# Altium PCB нижняя плата версия 3.PcbDoc (part 1 of 2)
Units mm, origin at the board's own origin, x right, y up, seen from the top; angles counter-clockwise.
Board outline 57.07 x 52.6 mm, 4 copper layers (Top Layer, Layer 1, Layer 2, Bottom Layer), stack 0.603 mm thick; 110 components, 105 nets, 540 pads, 81 vias.
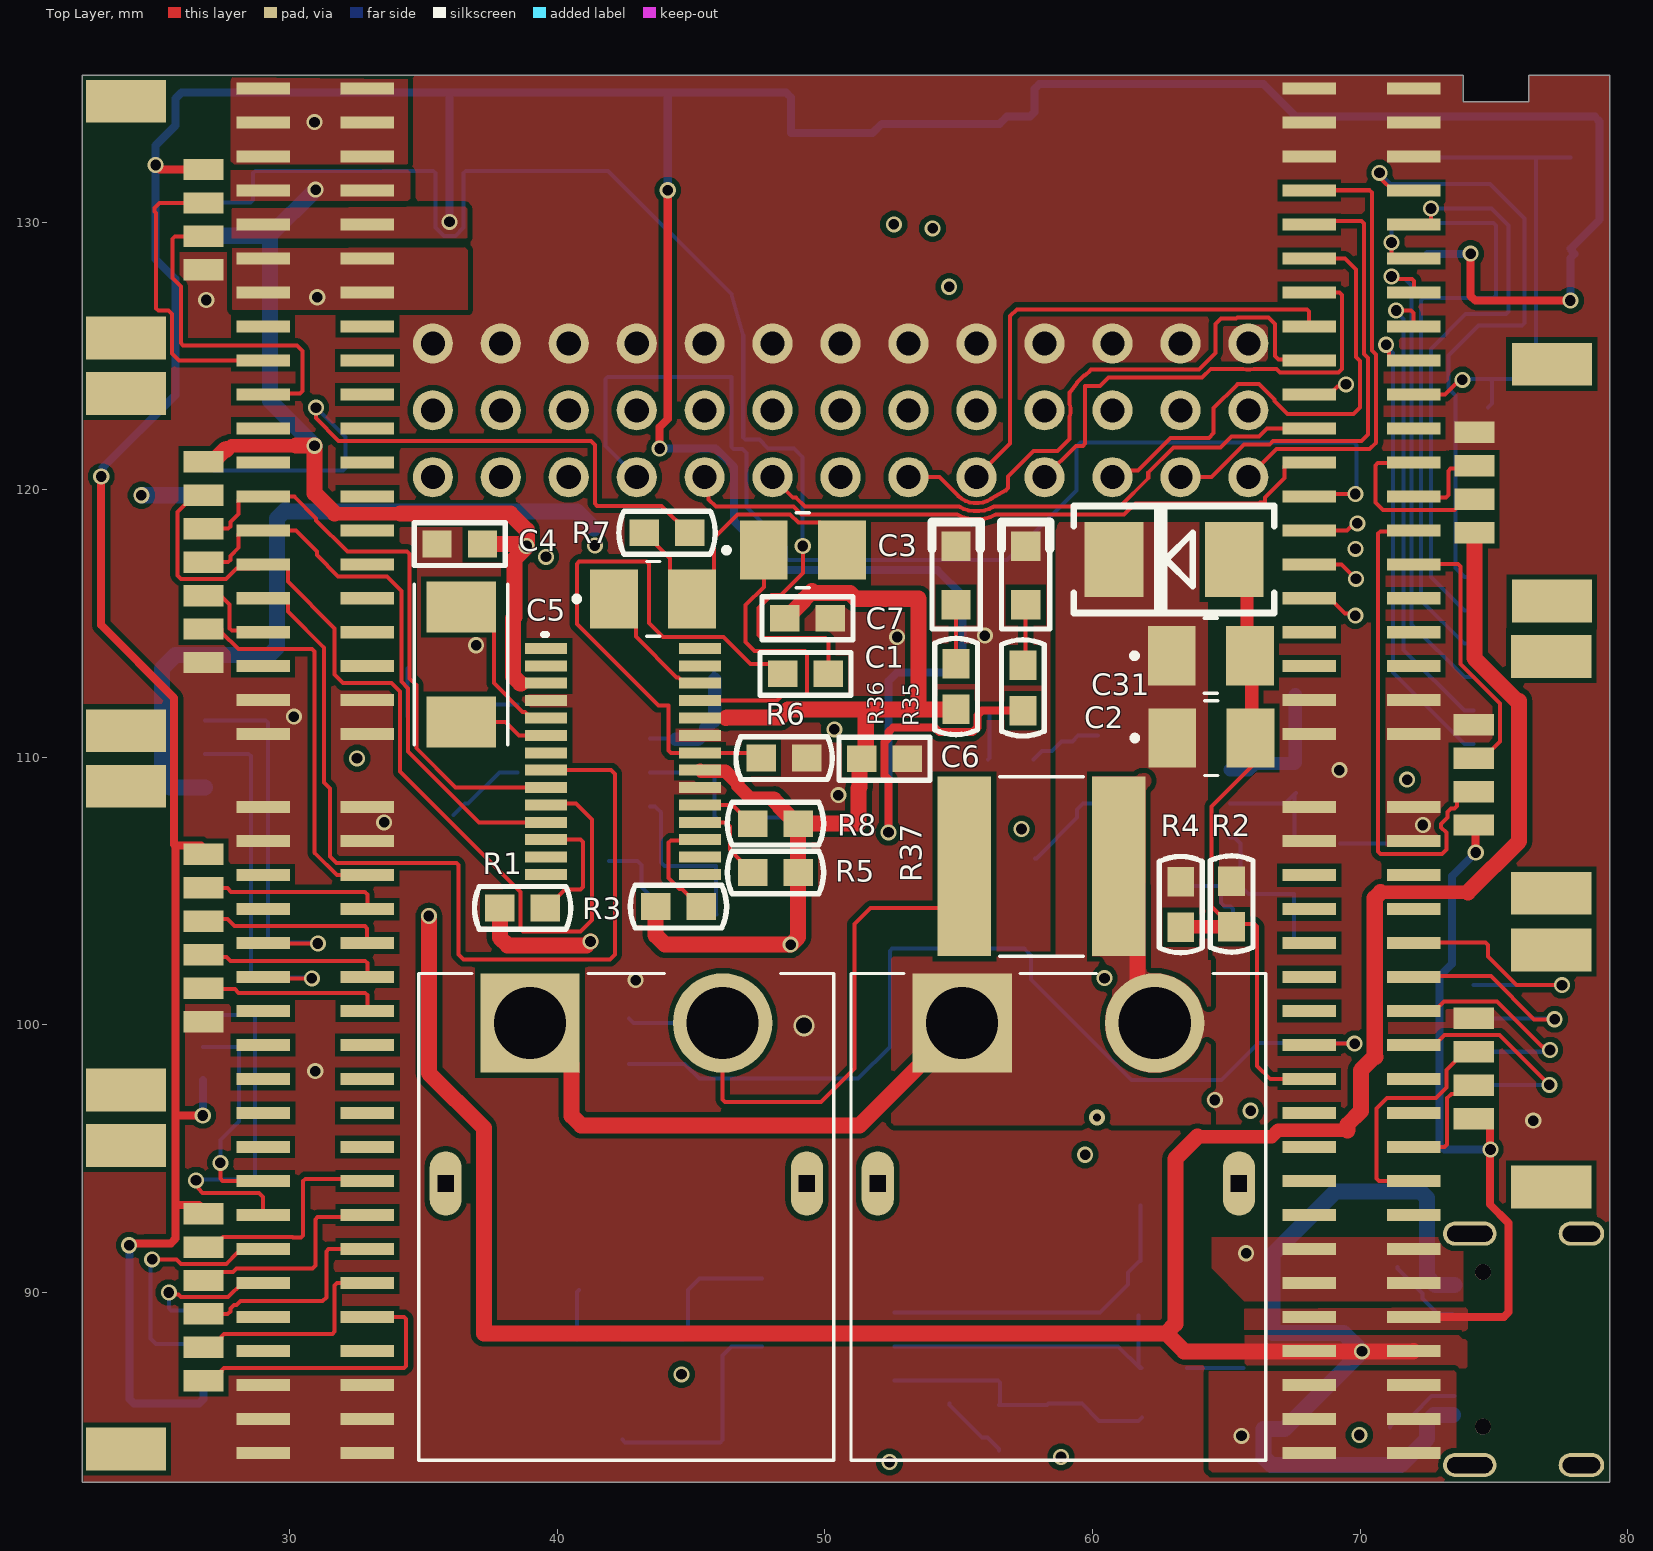
[diagram p0: Top Layer view]
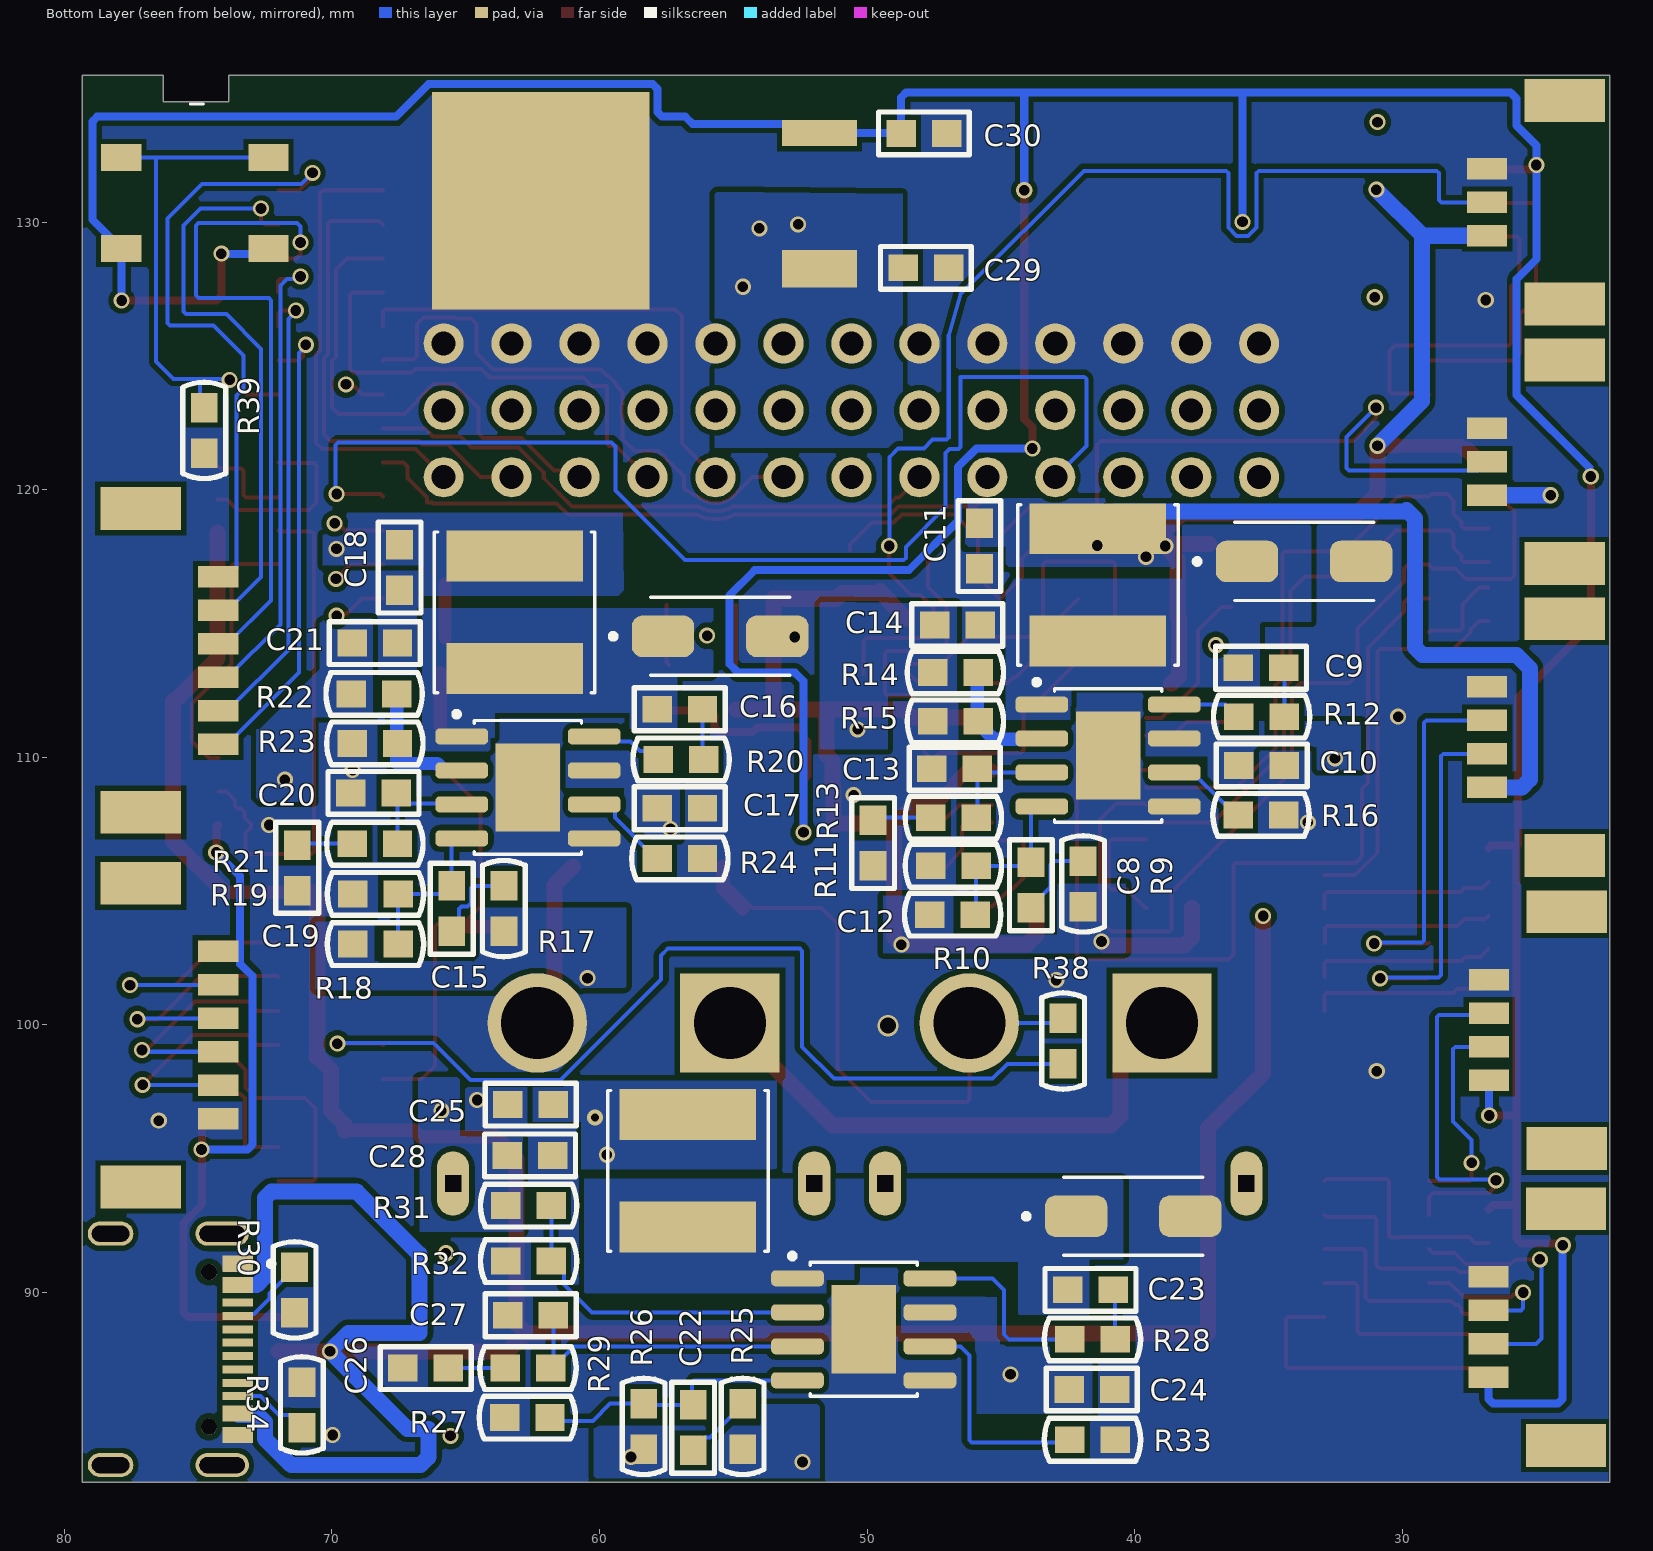
[diagram p1: Bottom Layer view, seen from below]
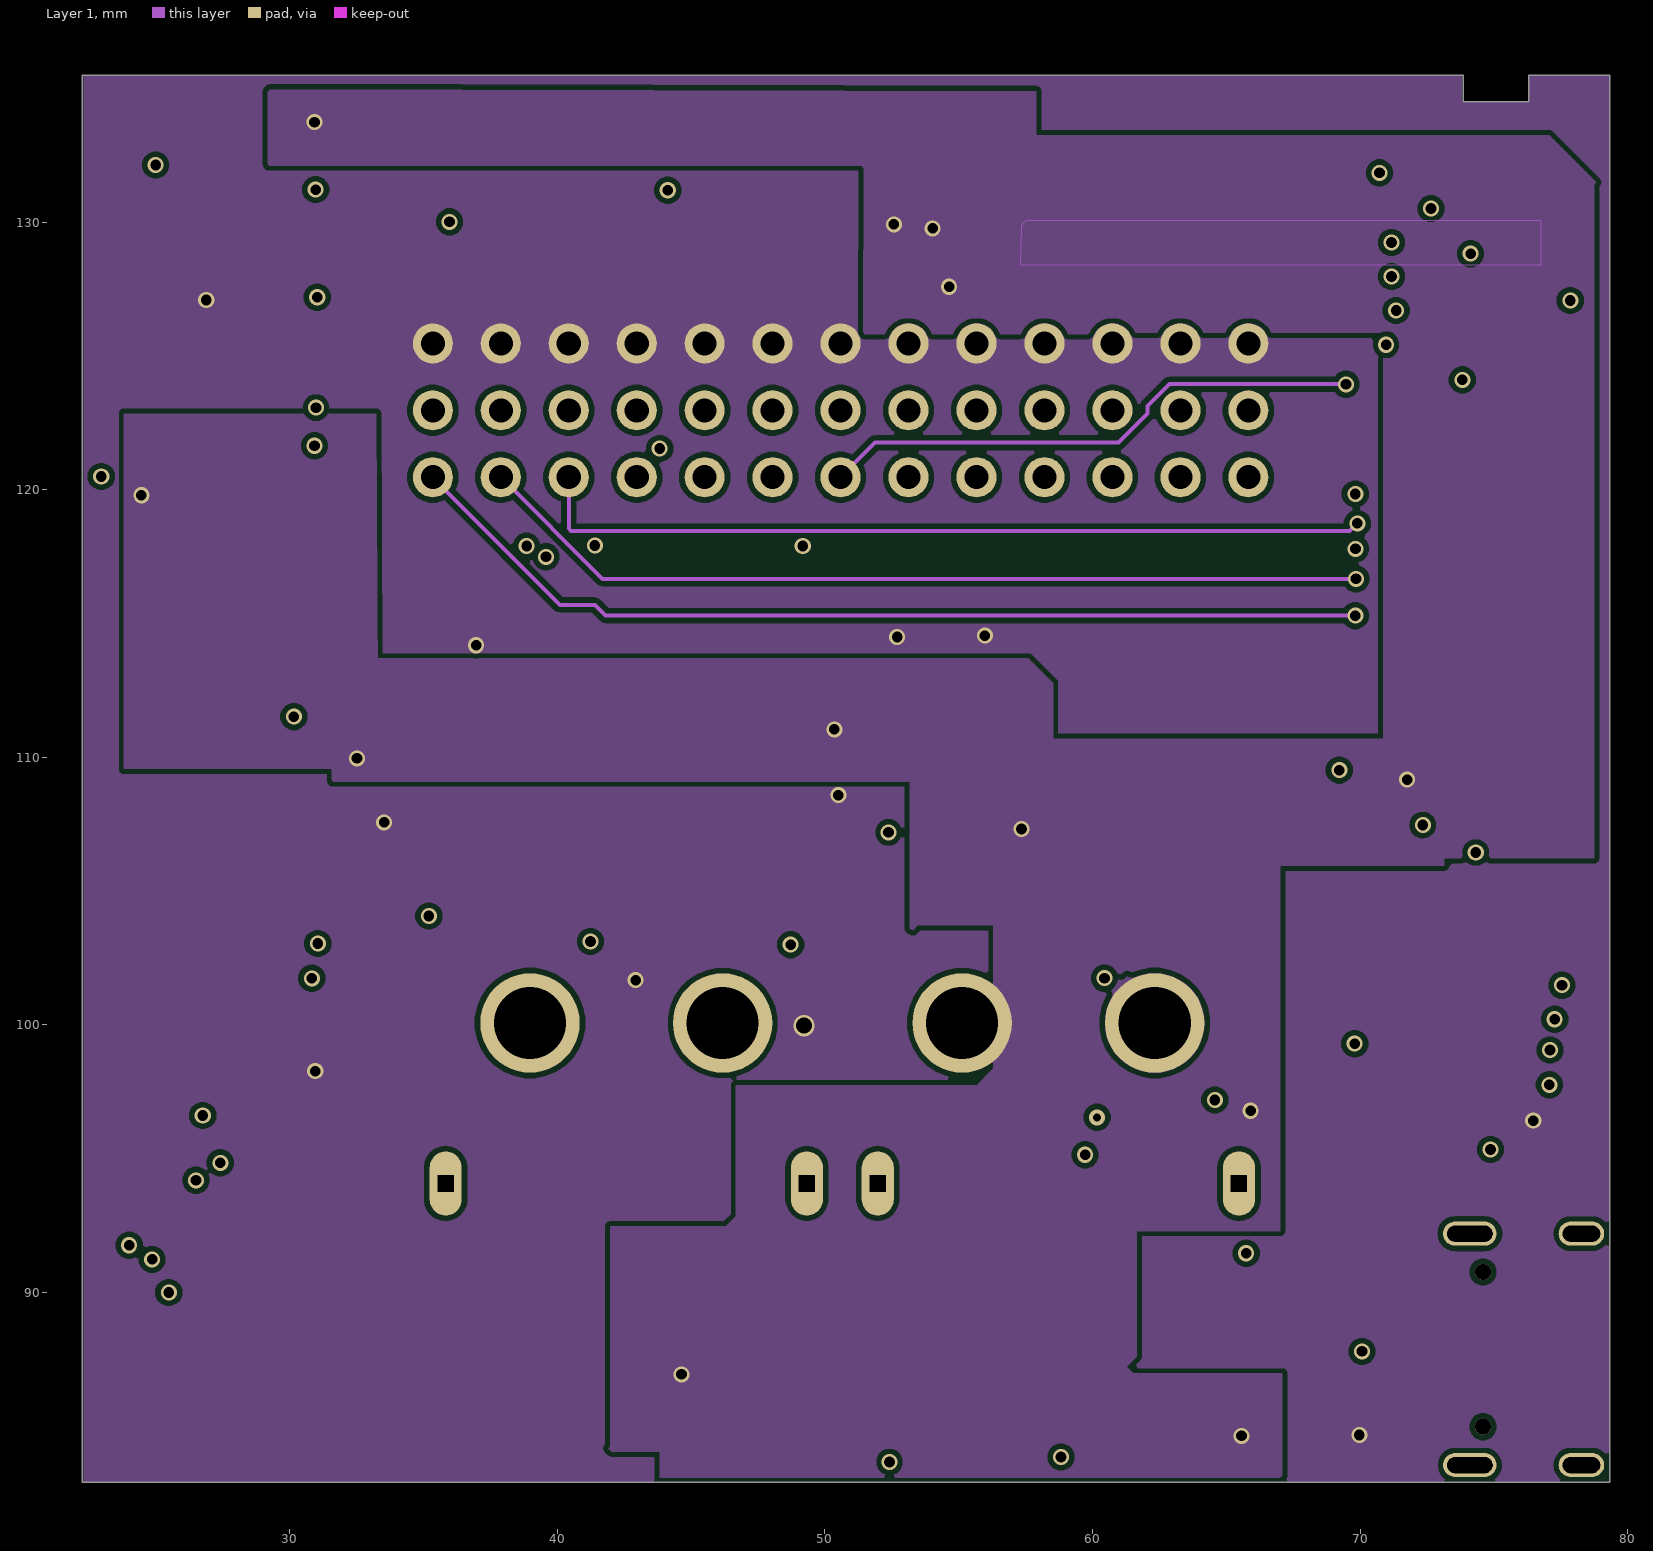
[diagram p2: Layer 1]
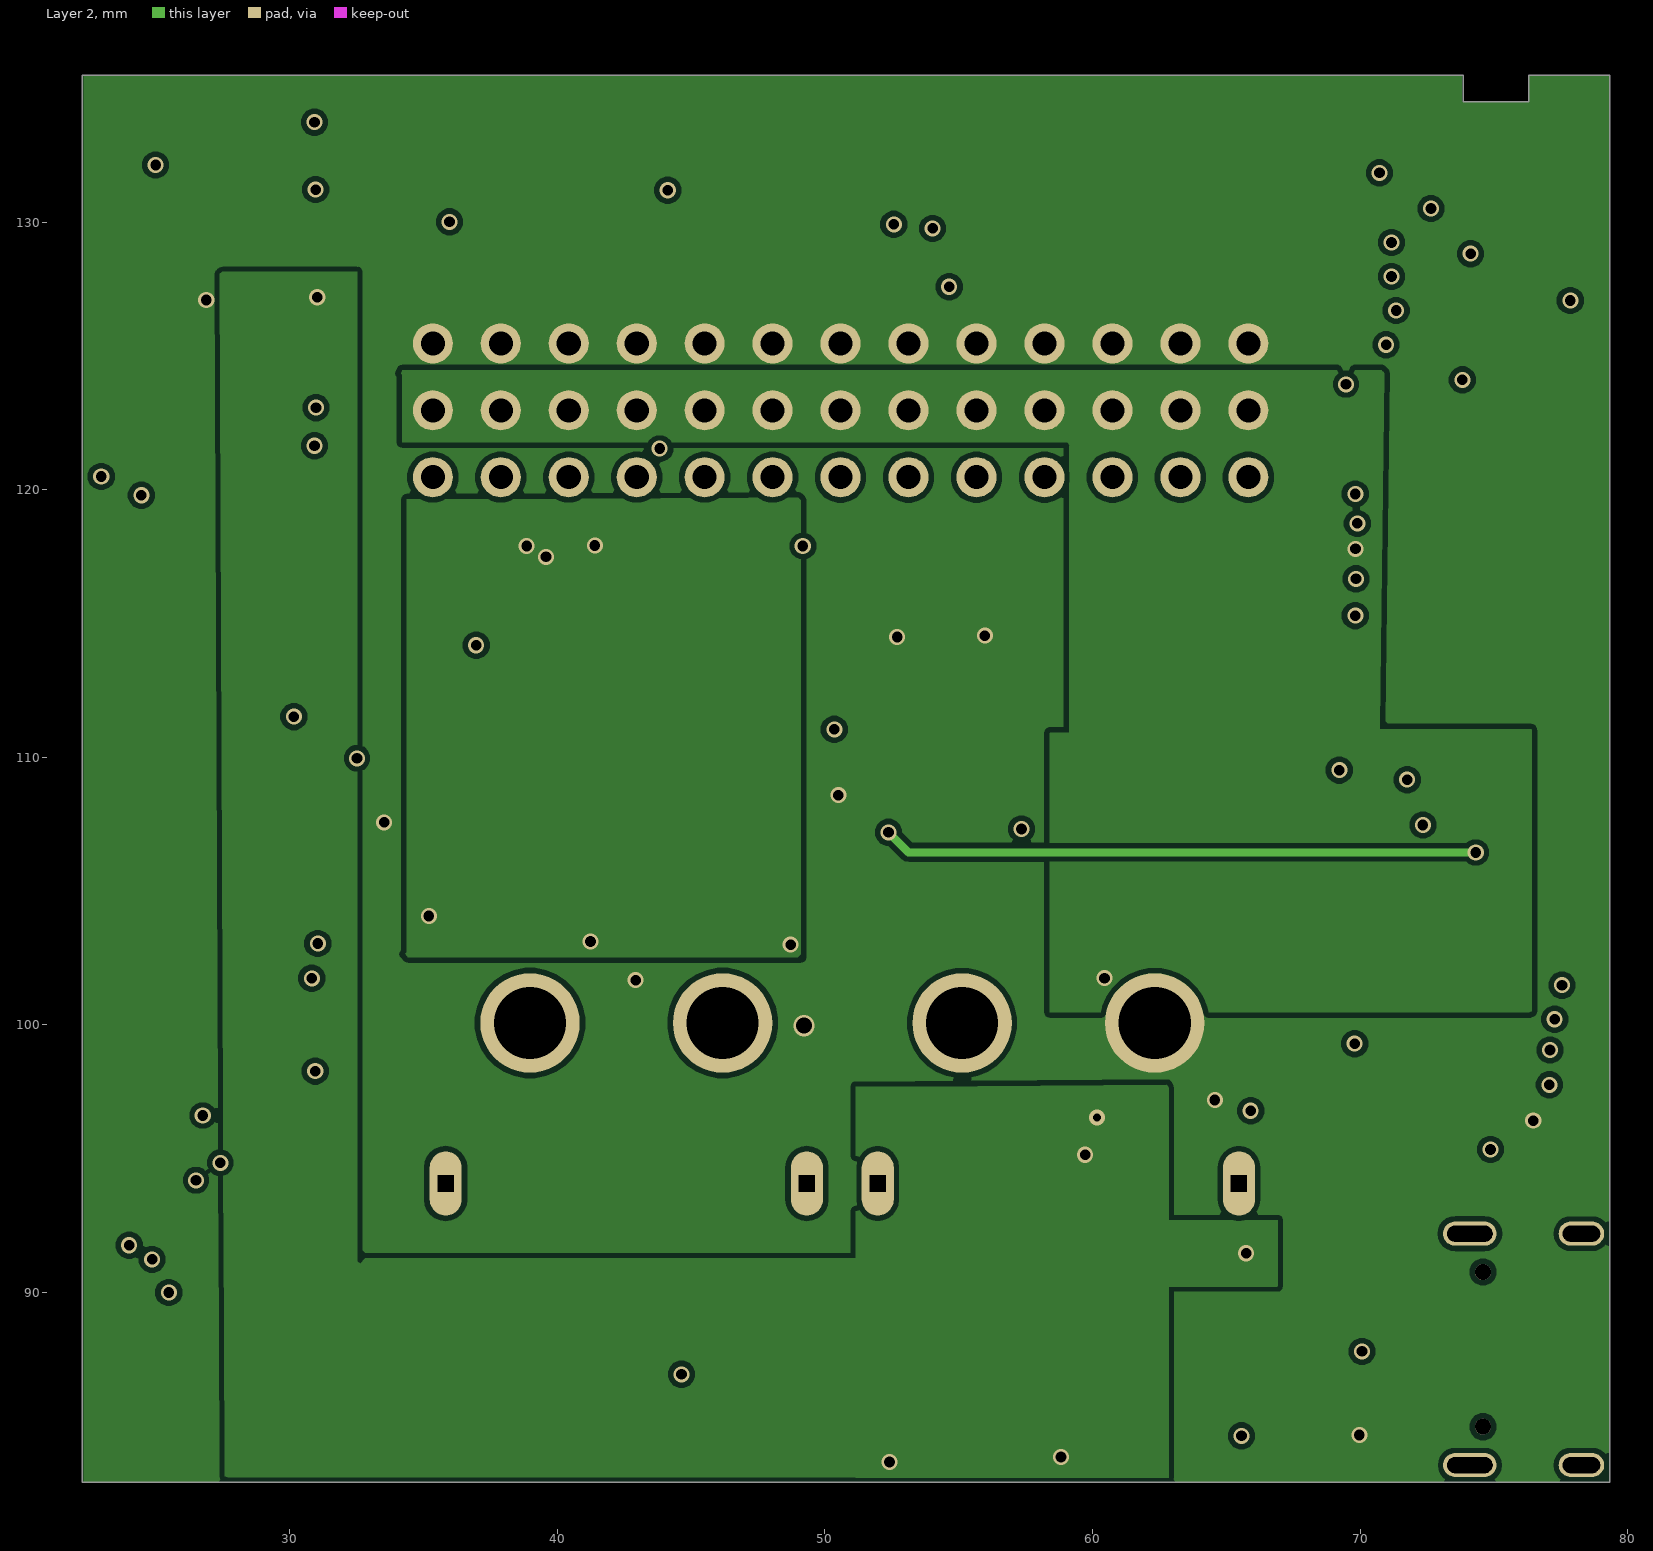
[diagram p3: Layer 2]
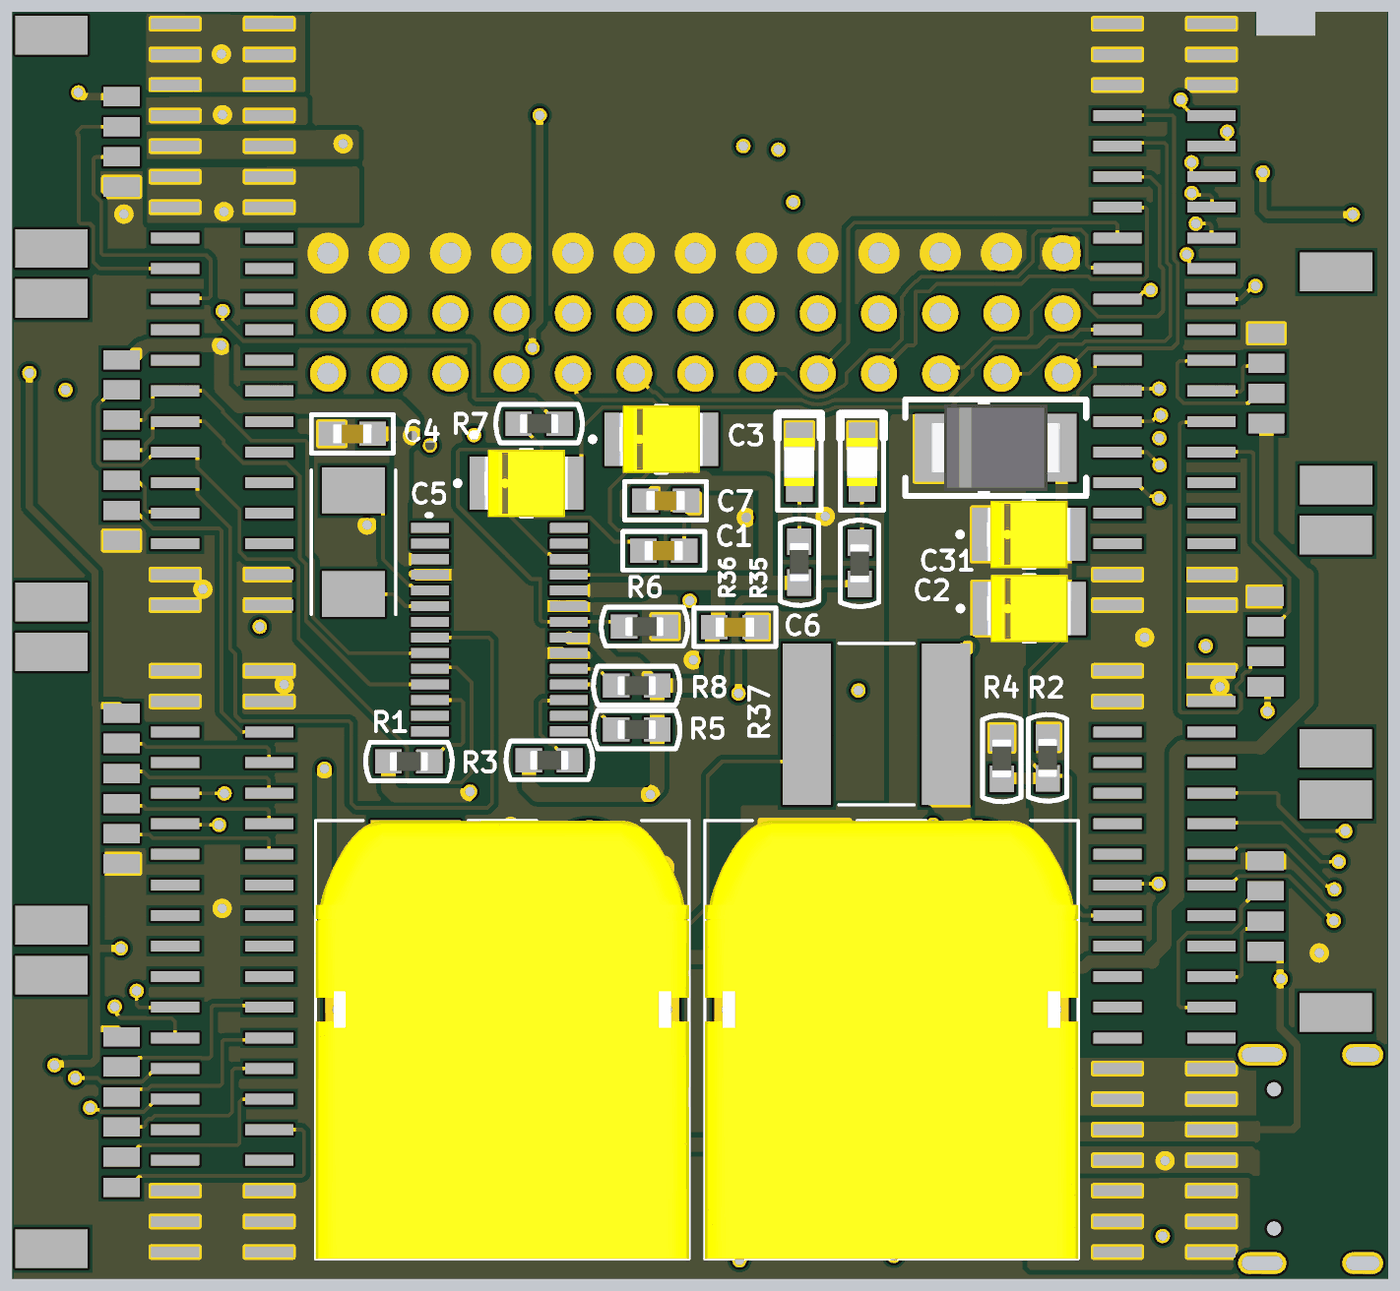
[diagram p5: 3D render of the assembled board from above, using the file's embedded part models]
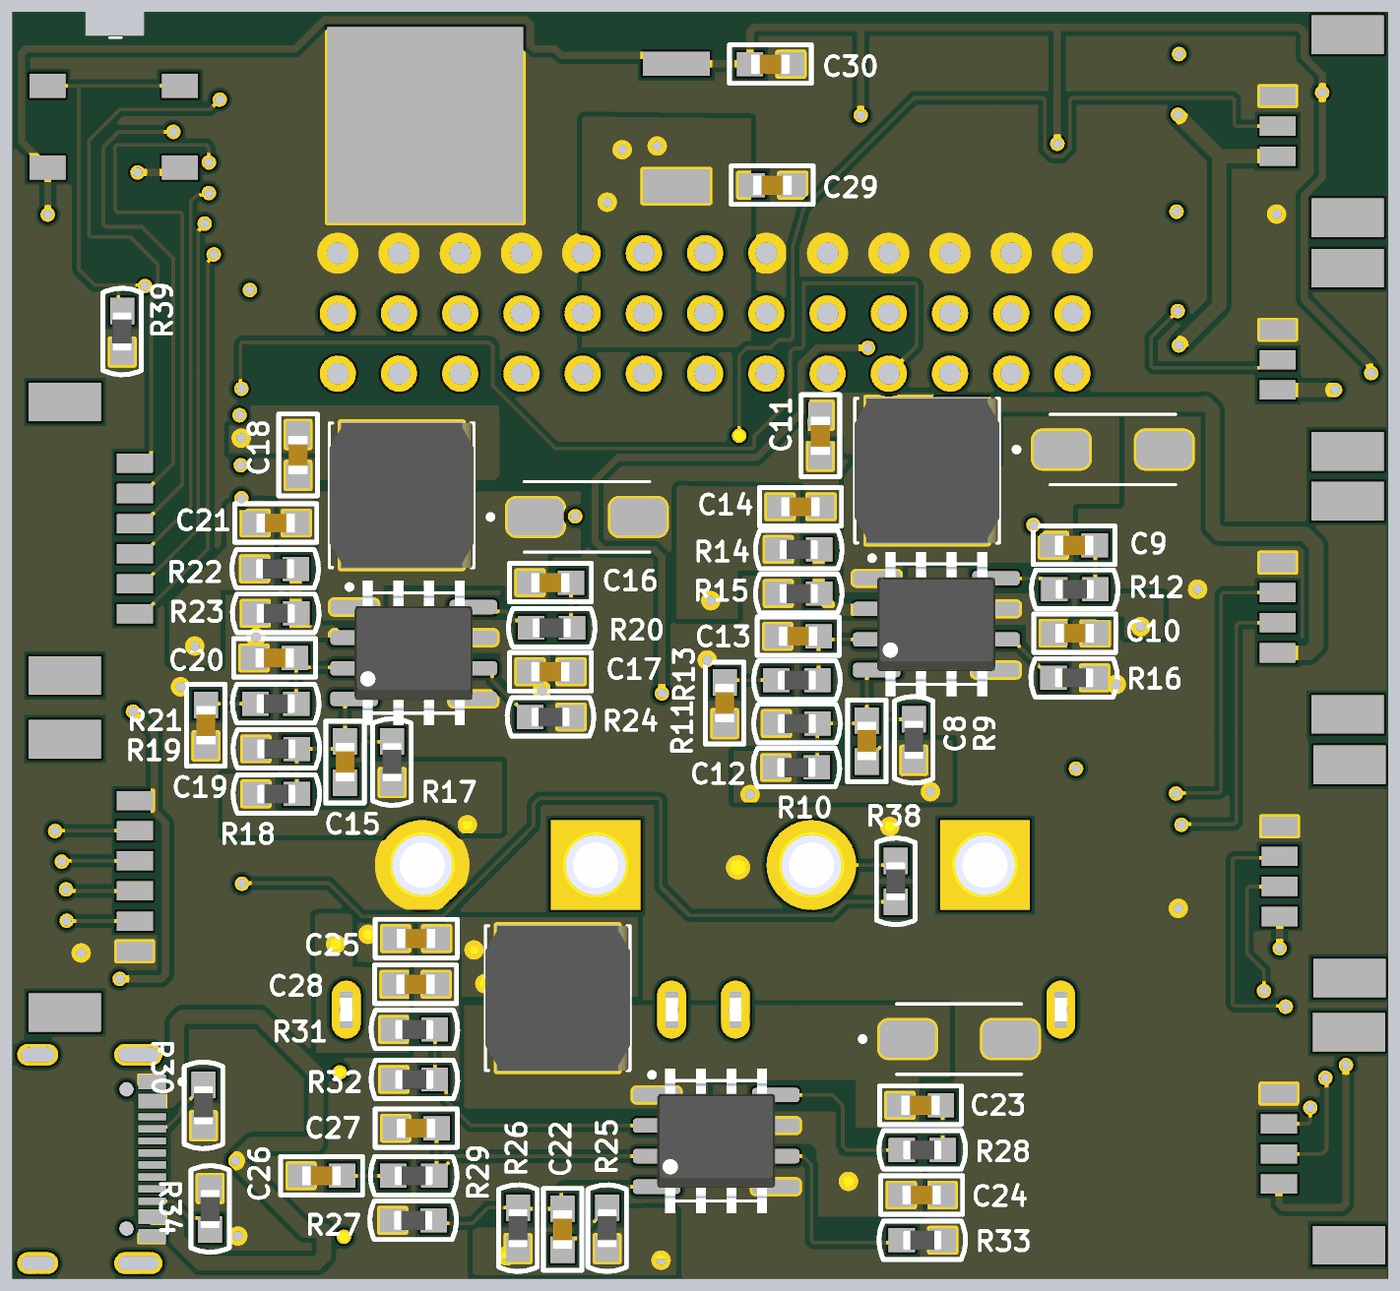
[diagram p6: 3D render of the assembled board from below, using the file's embedded part models]

## Layer stack, top to bottom
Top Solder: solder mask 0.0102, Solder Resist, Dk 3.5
Top Layer: signal copper 0.0356
Dielectric 2: prepreg 0.0711, PP-006, Dk 4.1
Layer 1: signal copper 0.035
Dielectric 1: dielectric 0.32, FR-4, Dk 4.8
Layer 2: signal copper 0.035
Dielectric 3: prepreg 0.0711, PP-006, Dk 4.1
Bottom Layer: signal copper 0.0356
Bottom Solder: solder mask 0.0102, Solder Resist, Dk 3.5

## Board outline
76.3,135.5 76.3,134.5 73.85,134.5 73.85,135.5 22.25,135.5 22.25,82.9 79.325,82.9 79.325,135.5

## Design rules (kind name [scope] priority, off if disabled: settings)
Clearance [All] p1: gap=0.2 ignorepadtopadclearanceinfootprint=FALSE except(0: Arc-Hole Track-Hole SMDPad-Hole THPad-Hole Via-Hole Fill-Hole Poly-Hole Region-Hole Text-Hole; 0.125: Arc-Text Track-Text SMDPad-Text THPad-Text Via-Text Fill-Text Poly-Text Region-Text Text-Text; 0.15: Arc-Arc Arc-Track Arc-SMDPad Arc-THPad Arc-Via Track-Track Track-SMDPad Track-THPad Track-Via SMDPad-SMDPad SMDPad-THPad SMDPad-Via THPad-THPad THPad-Via Via-Via)
PolygonConnect [All] p1: connectstyle=Direct reliefconductorwidth=0.254 reliefentries=4 polygonreliefangle="90 Angle" airgapwidth=0.254
RoutingVias [All] p1: holewidth=0.4 width=0.6 viastyle="Through Hole" minholewidth=0.4 minwidth=0.6 maxholewidth=0.4 maxwidth=0.6
SolderMaskExpansion [All] p1: expansion=0.102 istentingtop=FALSE
Width Width_6 [InNet('SERVO')] p1: maxlimit=0.6 minlimit=0.6 preferedwidth=0.6 minimp=50.000000 maximp=50.000000 favimp=50.000000
Width Width_5 [InNet('VCC')] p2: maxlimit=0.6 minlimit=0.6 preferedwidth=0.6 minimp=50.000000 maximp=50.000000 favimp=50.000000
Width Width_4 [InNet('GND')] p3: maxlimit=0.7 minlimit=0.6 preferedwidth=0.6 minimp=50.000000 maximp=50.000000 favimp=50.000000
Width Width_3 [InNet('5V')] p4: maxlimit=0.6 minlimit=0.5 preferedwidth=0.6 minimp=50.000000 maximp=50.000000 favimp=50.000000
Width Width_2 [InNet('4V2')] p5: maxlimit=0.4 minlimit=0.4 preferedwidth=0.4 minimp=50.000000 maximp=50.000000 favimp=50.000000
Width Width_1 [InNet('3V3')] p6: maxlimit=0.3 minlimit=0.3 preferedwidth=0.3 minimp=50.000000 maximp=50.000000 favimp=50.000000
Width [All] p7: maxlimit=0.6 minlimit=0.15 preferedwidth=0.15 minimp=50.000000 maximp=50.000000 favimp=50.000000
30 further rules are at their usual default settings.

## Classes and differential pairs
component class "нижняя плата версия 2": 3 C1 C2 C3 C4 C5 C6 C7 C8 C9 C10 C11 C12 C13 C14 C15 C16 C17 C18 C19 C20 C21 C22 C23 C24 C25 C26 C27 C28 C29 C30 C31 R1 R2 R3 R4 R5 R6 R7 R8 R9 R10 R11 R12 R13 R14 R15 R16 R17 R18 R19 R20 R21 R22 R23 R24 R25 R26 R27 R28 R29 R30 R31 R32 R33 R34 R35 R36 R37 R38 R39

## Components (designator, comment, footprint, x,y, rotation, side; value= is the part's Value field where it differs from the comment)
ADC "Header 1x6" "PicoBlade 6pin" 25.125,89.885 r270 top
AT "AT7456" at7456 42.377,109.301 r0 top
C1 "Capacitor" C0603 49.275,113.125 r0 top
C2 "T493B105K025BC6120" CAPPM3528X210N 64.44,110.725 r0 top
C3 "T493B105K025BC6120" CAPPM3528X210N 49.175,117.75 r0 top
C4 "Capacitor" C0603 36.35,117.975 r180 top
C5 "T493B105K025BC6120" CAPPM3528X210N 43.575,115.925 r0 top
C6 "Capacitor" C0603 52.225,109.95 r0 top
C7 "Capacitor" C0603 49.35,115.2 r0 top
C8 "22 pF" C0603 43.875,105.225 r90 bottom
C9 "0.1 uF" C0603 35.275,113.35 r0 bottom
C10 "0.1 uF" C0603 35.25,109.7 r0 bottom
C11 "22 uF" C0603 45.8,117.9 r270 bottom
C12 "330 pF" C0603 49.775,106.8 r270 bottom
C13 "1 pF" C0603 46.725,109.575 r0 bottom
C14 "4.7 uF" C0603 46.625,114.95 r0 bottom
C15 "22 pF" C0603 65.525,104.35 r90 bottom
C16 "0.1 uF" C0603 57,111.8 r0 bottom
C17 "0.1 uF" C0603 57,108.1 r0 bottom
C18 "22 uF" C0603 67.475,117.1 r270 bottom
C19 "330 pF" C0603 71.3,105.875 r270 bottom
C20 "1 pF" C0603 68.45,108.675 r0 bottom
C21 "4.7 uF" C0603 68.4,114.275 r0 bottom
C22 "22 pF" C0603 56.5,84.95 r90 bottom
C23 "0.1 uF" C0603 41.65,90.1 r0 bottom
C24 "0.1 uF" C0603 41.6,86.375 r0 bottom
C25 "33 uF" C0603 62.575,97.025 r0 bottom
C26 "330 pF" C0603 66.5,87.175 r0 bottom
C27 "2 pF" C0603 62.575,89.15 r0 bottom
C28 "4.7 uF" C0603 62.6,95.125 r0 bottom
C29 "0.1 uF" C0603 47.8,128.3 r0 bottom
C30 "10 uF" C0603 47.875,133.325 r0 bottom
C31 "T493B105K025BC6120" CAPPM3528X210N 64.425,113.8 r0 top
CAN1 "Header 1x4" "PicoBlade 4pin" 75.8,120.24 r90 top
D1 "B340A-13-F" DIOM5226X240N 33.665,117.325 r180 bottom
D2 "B340A-13-F" DIOM5226X240N 55.49,114.525 r180 bottom
D3 "B340A-13-F" DIOM5226X240N 40.05,92.85 r180 bottom
DC1 "MP1584EN" SOIC127P600X170-9N 40.993,110.075 r180 bottom
DC2 "MP1584EN" SOIC127P600X170-9N 62.675,108.88 r180 bottom
DC3 "MP1584EN" SOIC127P600X170-9N 50.125,88.625 r180 bottom
ENET "Header 1x6" "PicoBlade 6pin" 75.9,113.685 r270 bottom
GND "SERVO" SERV 50.458,125.475 r0 top
GPIO "Header 1x6" "PicoBlade 6pin" 25.125,103.31 r270 top
I2C "I2C 1x4" "PicoBlade 4pin" 25.3,110.725 r90 bottom
IN "IN 1x3" "PicoBlade 3pin" 24.175,130.79 r90 bottom
L1 "12.3 uH" IND_VLS6045EX-150M 41.375,116.45 r90 bottom
L2 "12.3 uH" IND_VLS6045EX-150M 63.175,115.425 r90 bottom
L3 "12.3 uH" IND_VLS6045EX-150M 56.7,94.55 r90 bottom
LDO "КФ1158Н" ТО-263 52.802,128.133 r90 bottom
LED1 "Text" LD0805 54.9,116.8 r90 top
LED2 "Text" LD0805 57.5,116.8 r90 top
OUT "OUT 1x3" "PicoBlade 3pin" 24.175,121.09 r90 bottom
R1 "1 kOm" R0603 38.7,104.375 r180 top
R2 "" R0603 65.2,104.525 r90 top
R3 "1 kOm" R0603 44.525,104.425 r180 top
R4 "" R0603 63.3,104.5 r90 top
R5 "1 kOm" R0603 48.15,105.7 r0 top
R6 "10 kOm" R0603 48.475,109.975 r180 top
R7 "10 kOm" R0603 44.1,118.4 r0 top
R8 "10 kOm" R0603 48.15,107.525 r0 top
R9 "0" R0603 41.925,105.275 r270 bottom
R10 "124 kOm" R0603 46.8,104.125 r0 bottom
R11 "23.7 kOm" R0603 46.775,105.95 r0 bottom
R12 "0" R0603 35.25,111.525 r0 bottom
R13 "76.8 kOm" R0603 46.775,107.75 r180 bottom
R14 "100 kOm" R0603 46.7,113.175 r0 bottom
R15 "18.7 kOm" R0603 46.7,111.35 r0 bottom
R16 "193.38 kOm" R0603 35.275,107.85 r180 bottom
R17 "0" R0603 63.575,104.35 r270 bottom
R18 "124 kOm" R0603 68.375,103.025 r0 bottom
R19 "23.7 kOm" R0603 68.375,104.9 r0 bottom
R20 "0" R0603 56.95,109.925 r0 bottom
R21 "76.8 kOm" R0603 68.4,106.775 r180 bottom
R22 "100 kOm" R0603 68.425,112.375 r0 bottom
R23 "18.7 kOm" R0603 68.4,110.525 r0 bottom
R24 "193.38 kOm" R0603 57,106.225 r180 bottom
R25 "0" R0603 54.65,85 r270 bottom
R26 "124 kOm" R0603 58.35,85 r270 bottom
R27 "29 kOm" R0603 62.7,85.325 r0 bottom
R28 "0" R0603 41.575,88.25 r0 bottom
R29 "100 kOm" R0603 62.675,87.175 r180 bottom
R30 "10 kOm" R0603 71.4,90.1 r270 bottom
R31 "100 kOm" R0603 62.65,93.25 r0 bottom
R32 "18.7 kOm" R0603 62.65,91.175 r0 bottom
R33 "193.38 kOm" R0603 41.575,84.5 r180 bottom
R34 "10 kOm" R0603 71.125,85.8 r90 bottom
R35 "10 kOm" R0603 57.4,112.6 r270 top
R36 "10 kOm" R0603 54.9,112.65 r270 top
R37 "" RESC6864X114N 58.1,105.925 r0 top
R38 "" R0603 42.675,99.4 r90 bottom
R39 "10 kOm" R0603 74.775,122.225 r90 bottom
S1 "SW-PB" TD-16EA 75.4,130.95 r180 bottom locked
SIGNAL "SERVO" SERV 50.458,120.475 r0 top
SPI "SPI 1x7" "PicoBlade 7pin" 26.75,117.335 r270 top
TYPE-C "TYPE-C-31-M-12" HRO_TYPE-C-31-M-12 78.275,87.875 r270 bottom
UART3 "UART 1x4" "PicoBlade 4pin" 25.225,99.775 r90 bottom
UART4 "UART 1x4" "PicoBlade 4pin" 75.775,109.315 r90 top
USART0 "UART 1x4" "PicoBlade 4pin" 25.25,88.675 r90 bottom
USART1 "UART 1x4" "PicoBlade 4pin" 25.25,130.135 r270 top
USART2 "UART 1x6" "PicoBlade 6pin" 75.9,99.685 r270 bottom
USART5 "UART 1x4" "PicoBlade 4pin" 75.775,98.34 r90 top
VCC "SERVO" SERV 50.458,122.975 r0 top
VD1 "Schottky" DO-214AA 63.05,117.4 r180 top
XP1 "PLLD-1.27-40S" "Headr 2x20 male" 30.947,123.149 r0 top
XP2 "PLLD-1.27-40S" "Headr 2x20 Male" 70.047,123.149 r0 top
XP3 "PLLD-1.27-40S" "Headr 2x20 male" 30.947,96.289 r0 top
XP4 "PLLD-1.27-40S" "Headr 2x20 Male" 70.047,96.289 r0 top
XT1 "XT60PW-M" AMASS_XT60PW-M 58.725,94.075 r180 top
XT2 "XT60PW-M" AMASS_XT60PW-M 42.575,94.075 r180 top
Y1 "ABM7-8.000MHZ-8-R80-D2Y-T" XTAL_ABM7-8.000MHZ-8-R80-D2Y-T 36.4,113.475 r90 top

## Footprints (in the part's own frame and the unit in brackets; to place one, negate y for a bottom-side part, rotate by r counter-clockwise, add the part's x,y. Pads: shape width x height; smd on the part's side, far side on the other; paste and mask are expansions set on the pad)
AMASS_XT60PW-M [mm]
  rect 3.716x3.716 / inner round 3.716 / far side rect 3.716x3.716 hole 2.7: 1(3.6,-6)
  round 3.716 hole 2.7: 2(-3.6,-6)
  oval 1.2x2.4 hole 0.6 square: S1(6.75,0) S2(-6.75,0)
  silkscreen extent -7.75,-7.85 7.75,10.35, body extent -7.75,-7.85 7.75,10.35, height 8.4
at7456 [mm]
  rect 1.57x0.41 smd: 1(-2.794,4.774) 2(-2.794,4.124) 3(-2.794,3.474) 4(-2.794,2.824) 5(-2.794,2.174) 6(-2.794,1.524) 7(-2.794,0.874) 8(-2.794,0.224) 9(-2.794,-0.426) 10(-2.794,-1.076) 11(-2.794,-1.726) 12(-2.794,-2.376) 13(-2.794,-3.026) 14(-2.794,-3.676) 15(2.956,-3.676) 16(2.956,-3.026) 17(2.956,-2.376) 18(2.956,-1.726) 19(2.956,-1.076) 20(2.956,-0.426) 21(2.956,0.224) 22(2.956,0.874) 23(2.956,1.524) 24(2.956,2.174) 25(2.956,2.824) 26(2.956,3.474) 27(2.956,4.124) 28(2.956,4.774)
C0603 [mm] "1608M"
  rect 1.1x1 smd: 1(-0.85,0) 2(0.85,0)
  silkscreen extent -1.7,-0.8 1.7,0.8, body extent -0.8,-0.4 0.8,0.4, height 0.91
CAPPM3528X210N [mm]
  rect 1.79x2.21 smd: 1(-1.46,0) 2(1.46,0)
  silkscreen extent -2.95,-1.4 0.25,1.4, body extent -1.75,-1.4 1.75,1.4, height 2.1
DIOM5226X240N [mm]
  rrect50% 2.33x1.55 smd: A(2.135,0) C(-2.135,0)
  silkscreen extent -4.1,-1.46 2.6,1.46
DO-214AA [mm] "(SMB) Low profile package"
  rect 2.2x2.8 smd: 1(-2.25,0) 2(2.25,0)
  silkscreen extent -3.75,-2 3.75,2, body extent -2.7,-1.8 2.7,1.8, height 2.3
"Headr 2x20 male" [mm]
  rect 2x0.45 smd: 1(-1.947,11.851) 2(1.953,11.851) 3(-1.947,10.581) 4(1.953,10.581) 5(-1.947,9.311) 6(1.953,9.311) 7(-1.947,8.041) 8(1.953,8.041) 9(-1.947,6.771) 10(1.953,6.771) 11(-1.947,5.501) 12(1.953,5.501) 13(-1.947,4.231) 14(1.953,4.231) 15(-1.947,2.961) 16(1.953,2.961) 17(-1.947,1.691) 18(1.953,1.691) 19(-1.947,0.421) 20(1.953,0.421) 21(-1.947,-0.849) 22(1.953,-0.849) 23(-1.947,-2.119) 24(1.953,-2.119) 25(-1.947,-3.389) 26(1.953,-3.389) 27(-1.947,-4.659) 28(1.953,-4.659) 29(-1.947,-5.929) 30(1.953,-5.929) 31(-1.947,-7.199) 32(1.953,-7.199) 33(-1.947,-8.469) 34(1.953,-8.469) 35(-1.947,-9.739) 36(1.953,-9.739) 37(-1.947,-11.009) 38(1.953,-11.009) 39(-1.947,-12.279) 40(1.953,-12.279)
"Headr 2x20 Male" [mm]
  rect 2x0.45 smd: 1(-1.947,11.851) 2(1.953,11.851) 3(-1.947,10.581) 4(1.953,10.581) 5(-1.947,9.311) 6(1.953,9.311) 7(-1.947,8.041) 8(1.953,8.041) 9(-1.947,6.771) 10(1.953,6.771) 11(-1.947,5.501) 12(1.953,5.501) 13(-1.947,4.231) 14(1.953,4.231) 15(-1.947,2.961) 16(1.953,2.961) 17(-1.947,1.691) 18(1.953,1.691) 19(-1.947,0.421) 20(1.953,0.421) 21(-1.947,-0.849) 22(1.953,-0.849) 23(-1.947,-2.119) 24(1.953,-2.119) 25(-1.947,-3.389) 26(1.953,-3.389) 27(-1.947,-4.659) 28(1.953,-4.659) 29(-1.947,-5.929) 30(1.953,-5.929) 31(-1.947,-7.199) 32(1.953,-7.199) 33(-1.947,-8.469) 34(1.953,-8.469) 35(-1.947,-9.739) 36(1.953,-9.739) 37(-1.947,-11.009) 38(1.953,-11.009) 39(-1.947,-12.279) 40(1.953,-12.279)
HRO_TYPE-C-31-M-12 [mm]
  rect 0.6x1.14 smd mask+0.05: A1_B12(-3.2,4.75) A4_B9(-2.4,4.75) B1_A12(3.2,4.75) B4_A9(2.4,4.75)
  rect 0.3x1.14 smd mask+0.05: A5(-1.25,4.75) A6(-0.25,4.75) A7(0.25,4.75) A8(1.25,4.75) B5(1.75,4.75) B6(0.75,4.75) B7(-0.75,4.75) B8(-1.75,4.75)
  oval 0.9x2 hole 0.6 slot 1.7 at 90 deg: S1(-4.325,4.17) S2(4.325,4.17)
  oval 0.9x1.7 hole 0.6 slot 1.4 at 90 deg: S3(-4.325,0) S4(4.325,0)
  round 0.6 hole 0.6 unplated: ""(-2.89,3.68) ""(2.89,3.68)
  silkscreen extent -3.3,5.9 -3.1,6.1
IND_VLS6045EX-150M [mm]
  rect 1.9x5.1 smd: 1(-2.1,0) 2(2.1,0)
  silkscreen extent -3,-3 3,3, body extent -3,-3 3,3, height 4.5
LD0805 [mm]
  rect 1.1x1.1 smd: 1(-1.1,0) 2(1.1,0)
  silkscreen extent -2,-0.9 2,0.9, body extent -1,-0.62 1,0.63, height 0.73
"PicoBlade 3pin" [mm]
  rect 0.8x1.5 smd: 1(-1.29,2.65) 2(-0.04,2.65) 3(1.21,2.65)
  rect 1.6x3 smd: S(-3.84,-0.25) S(3.76,-0.25)
"PicoBlade 4pin" [mm]
  rect 0.8x1.5 smd: 1(-1.84,1.525) 2(-0.59,1.525) 3(0.66,1.525) 4(1.91,1.525)
  rect 1.6x3 smd: S(-4.39,-1.375) S(4.46,-1.375)
"PicoBlade 6pin" [mm]
  rect 0.8x1.5 smd: 1(-3.065,1.65) 2(-1.815,1.65) 3(-0.565,1.65) 4(0.685,1.65) 5(1.935,1.65) 6(3.185,1.65)
  rect 1.6x3 smd: S(-5.615,-1.25) S(5.735,-1.25)
"PicoBlade 7pin" [mm]
  rect 0.8x1.5 smd: 1(-3.715,0.025) 2(-2.465,0.025) 3(-1.215,0.025) 4(0.035,0.025) 5(1.285,0.025) 6(2.535,0.025) 7(3.785,0.025)
  rect 1.6x3 smd: S(-6.265,-2.875) S(6.335,-2.875)
R0603 [mm] "1608M"
  rect 1.1x1 smd: 1(-0.85,0) 2(0.85,0)
  silkscreen extent -1.8,-0.8 1.8,0.8, body extent -0.8,-0.4 0.8,0.4, height 0.38
RESC6864X114N [mm]
  rect 2x6.71 smd: 1(-2.886,0) 2(2.886,0)
  silkscreen extent -1.56,-3.35 1.56,3.35
SERV [mm]
  round 1.5 hole 0.9: 1(-15.113,0) 2(-12.573,0) 3(-10.033,0) 4(-7.493,0) 5(-4.953,0) 6(-2.413,0) 7(0.127,0) 8(2.667,0) 9(5.207,0) 10(7.747,0) 11(10.287,0) 12(12.827,0) 13(15.367,0)
SOIC127P600X170-9N [mm]
  rrect54% 1.97x0.6 smd: 1(-2.475,1.905) 2(-2.475,0.635) 3(-2.475,-0.635) 4(-2.475,-1.905) 5(2.475,-1.905) 6(2.475,-0.635) 7(2.475,0.635) 8(2.475,1.905)
  rect 2.41x3.3 smd paste-3: 9(0,0)
  silkscreen extent -2.77,-2.5 2,2.84, body extent -2.45,-3 2.45,3, height 1.7
TD-16EA [mm]
  rect 1.5x1 smd: 1(-2.475,1.475) 1(3.025,1.475) 2(-2.475,-1.925) 2(3.025,-1.925)
  silkscreen extent 0.1,3.47 0.6,3.47
XTAL_ABM7-8.000MHZ-8-R80-D2Y-T [mm]
  rect 1.9x2.6 smd: 1(-2.15,0) 2(2.15,0)
  silkscreen extent -3,-1.75 3,1.75
ТО-263 [mm]
  rect 1.4x2.79 smd: 1(0.127,-1.022)
  rect 8.13x8.13 smd: 2(2.667,9.398)
  rect 0.99x2.79 smd: 3(5.207,-1.022)

## Part data
AT: "OSD"
C2 C3 C5 C31: "Tantalum Surface Mount Capacitors", Package="SMD-2 Kemet", Availability="In Stock", Check_prices=https://www.snapeda.com/parts/T493B105K025BC6120/KEMET/view-part/?ref=eda, MF=KEMET, MP=T493B105K025BC6120, Price=None, SnapEDA_Link=https://www.snapeda.com/parts/T493B105K025BC6120/KEMET/view-part/?ref=snap
C8 C9 C10 C11 C12 C13 C14 C15 C16 C17 C18 C19 C20 C21 C22 C23 C24 C25 C26 C27 C28 C29 C30: library part Capacitor, Published=18.05.2010, Publisher="Andrew Danich", Type=Конденсатор
D1 D2 D3: "Diode, Rectifier, 3a, 40v, Do-214ac, Full Reel", Package=None, Availability=Unavailable, MP=B340A-13-F, Price=None
L1 L2 L3: library part VLS6045EX-150M, "15 ÂµH Shielded Drum Core, Wirewound Inductor 2.5 A 75mOhm Nonstandard", Package="NON STANDARD-2 TDK", Availability="In Stock", Check_prices=https://www.snapeda.com/parts/VLS6045EX-150M/TDK/view-part/?ref=eda, MF=TDK, MP=VLS6045EX-150M, Price=None, Purchase-URL=https://pricing.snapeda.com/search/part/VLS6045EX-150M/?ref=eda, SnapEDA_Link=https://www.snapeda.com/parts/VLS6045EX-150M/TDK/view-part/?ref=snap
LED1 LED2: library part Led-1, Published=03.12.2013, Publisher="Andrew Danich", Type="Индикатор единичный"
R1 R2 R3 R4 R5 R6 R7 R8 R9 R10 R11 R12 R13 R14 R15 R16 R17 R18 R19 R20 R21 R22 R23 R24 R25 R26 R27 R28 R29 R30 R31 R32 R33 R34 R35 R36 R37 R38 R39: library part Resistor, Published=24.03.2010, Publisher="Andrew Danich", Type=Резистор
S1: "Switch", LatestRevisionDate=17-Jul-2002, LatestRevisionNote="Re-released for DXP Platform.", PackageDescription="Switch; 2 Leads", PackageReference=SPST-2, Published=24-Mar-1999, Publisher="Altium Limited"
Y1: "Crystal 22.1184MHz Ã‚Â±20ppm (Tol) Ã‚Â±30ppm (Stability) 18pF FUND 50Ohm 2-Pin Mini-CSMD T/R", Package=None, Availability=Unavailable, MP=ABM7-8.000MHZ-8-R80-D2Y-T, Price=None
C1 C4 C6 C7: Published=18.05.2010, Publisher="Andrew Danich", Type=Конденсатор
VD1: Published=18.05.2010, Publisher="Andrew Danich", Type=Диод

## Via types
v1: diameter 0.6, hole 0.4, Top Layer to Bottom Layer, 79 vias
v2: diameter 0.8, hole 0.6, Top Layer to Bottom Layer, 1 vias
v3: diameter 0.6, hole 0.3, Top Layer to Bottom Layer, 1 vias

## Nets (pads, with @x,y where several pads share a name; then routed paths per layer and width w, separated by ;. In a path a pad name is that pad's centre, name@x,y a point inside that pad or via, vN(x,y) a via of type N, cw(c..) or ccw(c..) an arc to the next point about the centre after c; other vN are vias at no path point)
3V3: ADC.1 C30.2 GPIO.1 LDO.3 R35.2 S1.2 UART3.1 UART4.1 USART0.1 USART1.1 USART2.1 USART5.1 XP1.9 XP1.10 XP4.31 XP4.32 | length 236.4
  Top Layer w0.3: v1(22.95,120.5) 22.95,114.949 25.675,112.224 25.675,106.751 25.725,106.701 ; v1(23.996,91.768) 24.053,91.825 24.589,91.825 24.603,91.839 25.549,91.839 25.725,92.015 25.725,93.276 ; v1@24.975,132.125 25.125,131.975 USART1.1@26.775,131.975 ; v1(26.746,96.618) 25.793,96.618 25.725,96.55 ; ADC.1@26.775,93.1 26.599,93.276 25.725,93.276 ; GPIO.1@26.775,106.6 26.674,106.701 25.725,106.701 ; v1(43.825,121.55) 43.825,122.35 44.125,122.65 v1(44.125,131.2) ; v1(52.375,107.2) 52.375,109.176 52.3,109.251 52.225,109.326 52.225,110.574 52.375,110.724 52.375,110.95 52.551,111.126 54.1,111.126 54.276,110.95 55.524,110.95 55.7,111.126 55.7,111.574 55.876,111.75 R35.2@57.4,111.75 ; XP4.32@72,89.09 75.374,89.09 75.55,89.266 75.55,92.6 74.85,93.3 74.85,96.25 74.6,96.5 USART5.1@74.25,96.5 ; v1(74.134,128.83) 74.134,127.251 74.31,127.075 77.85,127.075 v1@77.9,127.125 ; UART4.1@74.25,107.475 74.325,107.4 v1(74.325,106.45) ; 25.725,93.276 25.725,96.55 ; 25.725,96.55 25.725,106.701
  Layer 2 w0.3: v1(52.375,107.2) 53.125,106.45 v1(74.325,106.45)
  Bottom Layer w0.3: v1(22.95,120.5) 23.007,120.557 23.007,120.832 25.725,123.55 25.725,127.874 24.975,128.624 24.975,132.876 25.725,133.626 25.725,134.624 25.951,134.85 35.975,134.85 ; v1@24.126,91.825 24,91.699 24,86.026 24.176,85.85 26.599,85.85 26.775,86.026 USART0.1@26.775,86.835 ; v1@26.75,96.55 UART3.1@26.75,97.935 ; v1@35.975,129.95 35.975,134.85 ; v1@44.025,121.55 45.915,121.55 46.6,120.865 46.6,118.841 48.441,117 54.2,117 55.15,116.05 55.15,113.5 54.825,113.175 52.7,113.175 52.375,112.85 v1(52.375,107.2) ; v1(44.125,131.2) 44.125,134.8 44.175,134.85 ; S1.2@72.525,128.825 v1@74.125,128.825 ; v1(74.325,106.45) 73.438,105.563 73.438,102.287 72.975,101.825 72.975,95.526 73.151,95.35 v1(74.875,95.35) ; v1(77.859,127.08) 77.859,128.659 78.025,128.825 S1.2@77.899,128.951 ; S1.2@77.875,129.025 78.95,130.1 78.95,133.774 78.774,133.95 67.604,133.95 66.389,135.165 58.011,135.165 57.835,134.989 57.835,134.126 57.659,133.95 56.796,133.95 56.531,133.685 52.125,133.685 LDO.3@51.78,133.34 48.725,133.34 48.725,134.674 48.549,134.85 44.175,134.85 ; 35.975,134.85 44.175,134.85
  other v1: 35.971,130.018 24.983,132.145
4V2: C25.1 L3.2 R25.2 R26.2 XP1.11 XP1.12 XP1.13 XP1.14 XP4.27 XP4.28 XP4.29 XP4.30
  other v1: 52.413,83.669 58.825,83.85 65.746,91.468 59.725,95.15 31.025,127.2
  other v3: 60.175,96.55
5V: AT.3 AT.21 AT.24 C4.1 C6.1 C7.1 C11.1 CAN1.1 I2C.1 IN.1 L1.2 R1.2 R3.2 R5.2 R8.2 R9.2 R10.2 R36.2 SPI.1 TYPE-C.A4_B9 TYPE-C.B4_A9 XP1.7 XP1.8 XP4.33 XP4.34 | length 232.7
  Top Layer w0.5: 27.834,121.655 30.226,121.655 ; 31.754,119.115 34.126,119.115 ; AT.21@45.333,109.525 45.378,109.48 46.284,109.48 46.738,109.026 46.738,108.946 47.113,108.571 47.211,108.473 48.086,108.473 ; 63.925,95.825 66.694,95.825 66.934,96.065 69.532,96.065 ; 70.834,104.955 74.03,104.955
  Top Layer w0.6: SPI.1@26.775,121.05 27.125,121.05 27.575,121.5 27.609,121.5 27.644,121.535 ; 30.226,121.665 30.236,121.655 30.92,121.655 v1(30.925,121.65) 30.925,119.874 31.674,119.125 ; 34.126,119.125 34.136,119.115 38.241,119.115 38.856,118.5 38.856,117.906 v1(38.85,117.9) ; v1(35.196,104.075) 35.196,98.204 37.25,96.15 37.25,88.475 62.749,88.475 ; C4.1@37.2,117.975 38.775,117.975 v1(38.85,117.9) ; R1.2@37.85,104.375 37.85,103.268 38.143,102.975 41.087,102.975 v1(41.235,103.123) ; 38.632,112.77 38.612,112.77 38.348,113.034 38.348,115.202 38.398,115.252 38.398,117.421 38.85,117.873 v1(38.85,117.9) ; R3.2@43.675,104.425 43.675,103.355 44.026,103.003 v1(48.718,103.003) 49,103.286 R5.2@49,105.7 49,107.482 R8.2@48.957,107.525 ; 46.309,111.475 46.334,111.5 48.325,111.5 48.625,111.8 51.381,111.8 ; 48.086,108.425 48.3,108.211 48.3,108.175 48.95,107.525 R8.2@48.957,107.525 ; C7.1@48.5,115.2 48.55,115.2 49.2,115.85 49.2,115.9 49.525,116.225 49.6,116.15 50.936,116.15 51.154,115.932 53.5,115.932 53.5,111.8 ; R36.2@54.9,111.8 53.5,111.8 ; 63.925,95.825 63.1,95 63.1,88.826 62.749,88.475 ; 69.532,96.065 69.532,96.281 70.036,96.784 70.036,98.302 70.54,98.805 ; 70.575,98.805 70.575,98.814 70.55,98.839 70.55,104.741 70.774,104.965 ; XP4.34@72,87.82 71.98,87.8 v1(70.075,87.8) 63.424,87.8 62.749,88.475 ; 74.03,104.955 75.95,106.875 75.95,112.109 75.879,112.109 74.275,113.714 CAN1.1@74.275,118.4 ; R8.2@48.957,107.525 R8.2@49,107.525 51.25,107.525 51.25,108.849 51.289,108.887 51.289,109.864 51.525,110.1 51.525,111.656 51.381,111.8 ; 51.381,111.8 53.5,111.8
  Bottom Layer w0.5: v1@30.969,131.219 v1@30.975,131.225
  Bottom Layer w0.6: I2C.1@26.825,108.885 25.518,108.885 25.225,109.178 25.225,113.325 25.725,113.825 29.232,113.825 29.525,114.118 29.525,118.932 29.843,119.25 29.893,119.2 40.725,119.2 L1.2@41.375,118.55 ; IN.1@26.825,129.5 29.25,129.5 ; v1(30.925,121.65) 29.25,123.325 29.25,129.5 ; v1(30.964,131.224) 29.25,129.51 29.25,129.5 ; v1@70.056,87.781 67.182,84.907 66.4,84.907 66.4,83.843 66.693,83.55 71.516,83.55 72.505,84.539 72.505,85.161 72.769,85.425 TYPE-C.B4_A9@73.475,85.425 ; v1(70.075,87.8) 69.382,88.493 66.732,88.493 66.732,91.432 69.075,93.775 72.262,93.775 72.505,93.532 72.505,90.589 72.819,90.275 TYPE-C.A4_B9@73.525,90.275
  other v1: 39.575,117.5 41.4,117.925
GND: AT.4 AT.20 AT.23 C4.2 C6.2 C7.2 C10.1 C11.2 C12.2 C13.2 C14.1 C17.1 C18.2 C19.2 C20.2 C21.1 C24.1 C25.2 C26.2 C27.2 C28.1 C29.1 C30.1 CAN1.4 D1.A D2.A D3.A DC1.5 DC1.9 DC2.5 DC2.9 DC3.5 DC3.9 GND.1 GND.2 GND.3 GND.4 GND.5 GND.6 GND.7 GND.8 GND.9 GND.10 GND.11 GND.12 GND.13 GPIO.6 I2C.4 IN.3 LDO.2 LED1.2 LED2.2 OUT.3 R2.2 R6.1 R11.2 R15.2 R16.2 R19.2 R23.2 R24.2 R27.2 R30.2 R32.2 R33.2 R34.2 R37.2 R39.1 SPI.7 TYPE-C.A1_B12 TYPE-C.B1_A12 UART3.4 UART4.4 USART0.4 USART1.4 USART2.6 USART5.4 XP1.37 XP1.38 XP1.39 XP1.40 XP2.1 XP2.2 XP2.3 XP2.4 XP2.5 XP2.6 XP2.37 XP2.38 XP2.39 XP2.40 XP3.1 XP3.2 XP3.3 XP3.4 XP3.35 XP3.36 XP3.37 XP3.38 XP3.39 XP3.40 XP4.1 XP4.2 XP4.3 XP4.4 XT1.2 | length 6.4
  Top Layer w0.6: R37.2@60.986,105.925 61.686,105.225 61.686,101.557 62.325,100.918 XT1.2@62.325,100.075
  other v1: 69.975,84.675 76.475,96.425 64.575,97.2 30.95,98.275 42.925,101.675 72.35,107.475 33.525,107.575 50.5,108.59 69.225,109.525 30.15,111.525 36.966,114.194 52.7,114.5 55.975,114.55 26.875,127.1
  other v2: 49.218,99.978
NetADC_2: ADC.2 XP3.24 | length 8.4
  Top Layer w0.15: ADC.2@26.775,91.85 27.275,91.85 27.505,92.08 30.093,92.08 30.123,92.05 30.412,92.05 30.5,92.138 30.5,94.162 30.588,94.25 32.82,94.25 XP3.24@32.9,94.17
NetADC_3: ADC.3 XP3.26 | length 8.1
  Top Layer w0.15: ADC.3@26.775,90.6 26.95,90.775 27.872,90.775 28.004,90.907 30.844,90.907 30.95,91.013 30.95,92.737 31.038,92.825 32.825,92.825 XP3.26@32.9,92.9
NetADC_4: ADC.4 XP3.28 | length 8.2
  Top Layer w0.15: ADC.4@26.775,89.2 27.675,89.2 27.775,89.3 27.775,89.408 27.907,89.54 28.015,89.54 28.15,89.675 31.225,89.675 31.363,89.813 31.363,91.542 31.451,91.63 XP3.28@32.9,91.63
NetADC_5: ADC.5 XP3.30 | length 8.1
  Top Layer w0.15: ADC.5@26.775,88.1 27.275,88.1 27.45,88.275 27.45,88.362 27.538,88.45 31.587,88.45 31.675,88.538 31.675,90.262 31.763,90.35 32.89,90.35 XP3.30@32.9,90.36
NetADC_6: ADC.6 XP3.32 | length 11
  Top Layer w0.15: ADC.6@26.775,86.85 27.275,86.85 27.45,87.025 27.45,87.087 27.538,87.175 34.262,87.175 34.35,87.263 34.35,89.002 34.262,89.09 XP3.32@32.9,89.09
NetAT_5: AT.5 Y1.2 | length 6.1
  Top Layer w0.15: Y1.2@36.4,115.625 36.75,115.625 37.625,114.75 37.625,112.775 38.705,111.695 38.783,111.695 39.003,111.475 AT.5@39.583,111.475
NetAT_6: AT.6 Y1.1 | length 3.4
  Top Layer w0.15: Y1.1@36.4,111.325 38.064,111.325 38.564,110.825 AT.6@39.583,110.825
NetAT_8: AT.8 XP1.31 | length 34.8
  Top Layer w0.15: XP1.31@29,115.95 29.775,115.95 29.925,115.8 29.925,115.45 31.275,114.1 31.275,109.063 31.495,108.843 31.495,106.292 31.737,106.05 36.225,106.05 36.3,105.975 36.3,102.639 36.489,102.45 41.962,102.45 42.15,102.638 42.15,109.387 42.012,109.525 AT.8@39.583,109.525
NetAT_9: AT.9 SPI.3 XP1.25 | length 22.4
  Top Layer w0.15: SPI.3@26.775,118.55 27.687,118.55 27.775,118.638 27.775,118.808 28.075,119.108 28.075,119.61 28.313,119.848 28.912,119.848 XP1.25@29,119.76 30.165,119.76 30.986,118.939 30.986,118.861 32.147,117.7 34.387,117.7 34.475,117.612 34.475,112.957 34.725,112.707 34.725,110.35 36.2,108.875 AT.9@39.583,108.875
NetAT_10: AT.10 SPI.2 XP1.29 | length 34.8
  Top Layer w0.15: SPI.2@26.775,119.8 26.425,119.8 25.8,119.175 25.8,116.807 25.932,116.675 27.618,116.675 28.013,117.07 28.85,117.07 XP1.29@29,117.22 29.775,117.22 29.925,117.07 29.925,116.568 31.675,114.818 31.675,113.092 31.992,112.775 33.808,112.775 34.125,112.458 34.125,109.468 38.625,104.968 38.625,103.588 38.713,103.5 40.869,103.5 41.3,103.931 41.3,107.672 40.697,108.275 39.633,108.275 AT.10@39.583,108.225
NetAT_11: AT.11 SPI.4 XP1.27 | length 21.6
  Top Layer w0.15: SPI.4@26.775,117.3 27.687,117.3 27.775,117.388 27.775,117.538 28.075,117.838 28.075,118.34 28.225,118.49 XP1.27@29,118.49 30.225,118.49 31.016,117.699 31.016,117.561 31.807,116.77 33.623,116.77 34.175,116.218 34.175,112.832 34.425,112.582 34.425,110.226 37.076,107.575 AT.11@39.583,107.575
NetAT_12: AT.12 R1.1 | length 4.8
  Top Layer w0.15: R1.1@39.55,104.375 39.6,104.375 40.288,105.063 40.862,105.063 40.95,105.151 40.95,106.837 40.862,106.925 AT.12@39.583,106.925
NetAT_17: AT.17 R3.1 | length 4.2
  Top Layer w0.15: AT.17@45.333,106.925 45.308,106.9 44.238,106.9 44.15,106.812 44.15,105.5 44.561,105.088 44.662,105.088 45.325,104.425 R3.1@45.375,104.425
NetAT_18: AT.18 R5.1 | length 3.3
  Top Layer w0.15: AT.18@45.333,107.575 46.3,107.575 46.45,107.425 46.45,106.55 46.825,106.175 46.825,106.125 47.25,105.7 R5.1@47.3,105.7
NetAT_19: AT.19 R8.1 | length 2.3
  Top Layer w0.15: AT.19@45.333,108.225 46.55,108.225 47.25,107.525 R8.1@47.3,107.525
NetAT_22: AT.22 C1.1 R6.2 | length 23.6
  Top Layer w0.15: R6.2@47.45,109.8 47.45,110.025 47.3,110.175 AT.22@45.333,110.175 44.238,110.175 44.15,110.263 44.15,111.95 43.772,111.95 40.725,114.997 40.725,117.237 40.813,117.325 43.337,117.325 43.425,117.237 43.425,115.025 43.945,114.505 46.211,114.505 47.216,113.5 C1.1@48.45,113.5 ; R6.2@47.625,109.975 R6.2@47.875,110.225 ; C1.1@48.15,112.85 C1.1@48.425,113.125
NetAT_25: AT.25 C3.1 | length 11.8
  Top Layer w0.15: AT.25@45.333,112.125 48.208,112.125 48.408,112.325 49.25,112.325 49.338,112.413 49.338,113.887 49.25,113.975 47.375,113.975 47.037,114.313 47.037,115.699 47.715,116.377 C3.1@47.715,117.75
NetAT_26: AT.26 C5.1 | length 4.9
  Top Layer w0.15: C5.1@42.115,115.925 42.935,115.105 42.935,114.515 44.455,112.995 44.533,112.995 44.753,112.775 AT.26@45.333,112.775
NetC1_2: C1.2 IN.2 | length 46.5
  Top Layer w0.15: v1(49.171,117.9) 49.175,117.896 49.175,116.892 48.356,116.073 48.004,116.073 47.525,115.593 47.525,114.575 47.637,114.463 50.012,114.463 50.125,114.35 C1.2@50.125,113.125
  Bottom Layer w0.15: IN.2@26.825,130.75 28.537,130.75 28.625,130.838 28.625,131.837 28.713,131.925 35.358,131.925 35.446,131.837 35.446,129.801 35.753,129.493 36.188,129.493 36.496,129.801 36.496,131.837 36.583,131.925 41.9,131.925 46.5,127.325 46.947,125.767 46.947,121.963 47.035,121.875 47.55,121.875 47.875,121.55 48.841,121.55 49.171,121.221 v1(49.171,117.9)
NetC2_2: C2.2 C31.2 R2.1 R4.1 VD1.1 XP4.17 | length 21.2
  Top Layer w0.15: R2.1@64.9,103.675 65,103.775 R2.1@65.1,103.775 ; R2.1@65.2,103.675 R2.1@65.1,103.775 ; C2.2@65.96,109.675 64.45,108.165 64.45,104.425 65.05,103.825 R2.1@65.1,103.775 ; XP4.17@68.1,97.98 66.645,97.98 66.15,98.475 66.15,103.687 66.062,103.775 R2.1@65.1,103.775
  Top Layer w0.5: R4.1@63.3,103.675 R2.1@64.9,103.675 ; C31.2@65.775,114.474 VD1.1@65.775,116.474 ; C2.2@65.95,111.174 C31.2@65.95,113.174
NetC3_2: C3.2 C5.2 R7.1 | length 11.7
  Top Layer w0.15: R7.1@43.25,118.4 43.3,118.4 43.725,117.975 43.725,117.925 44.215,117.435 44.215,116.745 C5.2@45.035,115.925 45.855,116.745 45.855,118.208 46.727,119.08 48.703,119.08 49.003,118.78 49.815,118.78 50.635,117.96 C3.2@50.635,117.75
NetC8_1: C8.1 R9.1 | length 3.2
  Bottom Layer w0.15: R9.1@41.925,106.125 43,106.125 43.15,105.975 43.15,105.15 43.875,104.425 C8.1@43.875,104.375
NetC8_2: C8.2 DC1.4 R10.1 R11.1 | length 6.3
  Bottom Layer w0.15: DC1.4@43.468,108.17 43.657,108.17 43.875,107.952 C8.2@43.875,106.075 44,105.95 R11.1@45.925,105.95 45.925,104.15 R10.1@45.95,104.125
NetC9_1: C9.1 R12.1 | length 1.8
  Bottom Layer w0.15: R12.1@34.4,111.525 34.4,113.325 C9.1@34.425,113.35
NetC9_2: C9.2 D1.C DC1.1 L1.1
NetC12_1: C12.1 R13.1 | length 2.2
  Bottom Layer w0.15: R13.1@47.625,107.75 49.675,107.75 C12.1@49.775,107.65
NetC13_1: C13.1 DC1.3 R13.2 | length 4.3
  Bottom Layer w0.15: DC1.3@43.468,109.44 45.74,109.44 C13.1@45.875,109.575 45.875,107.8 R13.2@45.925,107.75
NetC15_1: C15.1 R17.1 | length 3.3
  Bottom Layer w0.15: R17.1@63.575,105.2 64.712,105.2 64.8,105.112 64.8,104.557 64.932,104.425 65.162,104.425 65.25,104.337 65.25,103.775 C15.1@65.525,103.5
NetC15_2: C15.2 DC2.4 R18.1 R19.1 | length 6.1
  Bottom Layer w0.15: DC2.4@65.147,107.006 65.307,107.006 65.525,106.788 C15.2@65.525,105.2 65.825,104.9 R19.1@67.525,104.9 R18.1@67.525,103.025
NetC16_1: C16.1 R20.1 | length 1.9
  Bottom Layer w0.15: R20.1@56.1,109.925 56.15,109.975 C16.1@56.15,111.8
NetC16_2: C16.2 D2.C DC2.1 L2.1
NetC19_1: C19.1 R21.1 | length 2.1
  Bottom Layer w0.15: R21.1@69.25,106.775 71.25,106.775 C19.1@71.3,106.725
NetC20_1: C20.1 DC2.3 R21.2 | length 4.5
  Bottom Layer w0.15: DC2.3@65.147,108.276 67.201,108.276 C20.1@67.55,108.625 ; R21.2@67.55,106.775 C20.1@67.55,108.625 ; C20.1@67.6,108.675 C20.1@67.55,108.625
NetC22_1: C22.1 R25.1 | length 2.6
  Bottom Layer w0.15: R25.1@54.65,85.85 54.65,85.8 55.875,84.575 56.075,84.575 56.5,84.15 C22.1@56.5,84.1
NetC22_2: C22.2 DC3.4 R26.1 R27.1 | length 10.5
  Bottom Layer w0.15: DC3.4@52.6,86.72 56.462,86.72 56.55,86.632 56.55,85.85 C22.2@56.5,85.8 58.3,85.8 R26.1@58.35,85.85 59.6,85.85 60.25,85.2 61.725,85.2 R27.1@61.85,85.325
NetC23_1: C23.1 R28.1 | length 1.9
  Bottom Layer w0.15: R28.1@40.725,88.25 40.725,90.025 C23.1@40.8,90.1
NetC23_2: C23.2 D3.C DC3.1 L3.1
NetC26_1: C26.1 R29.1 | length 2.1
  Bottom Layer w0.15: R29.1@63.525,87.175 C26.1@65.65,87.175